# Altium PCB Control_Panel.PcbDoc
Units mm, origin at the board's own origin, x right, y up, seen from the top; angles counter-clockwise.
Board outline 130.03 x 155 mm, 2 copper layers (Top Layer, Bottom Layer); 144 components, 141 nets, 457 pads, 123 vias.
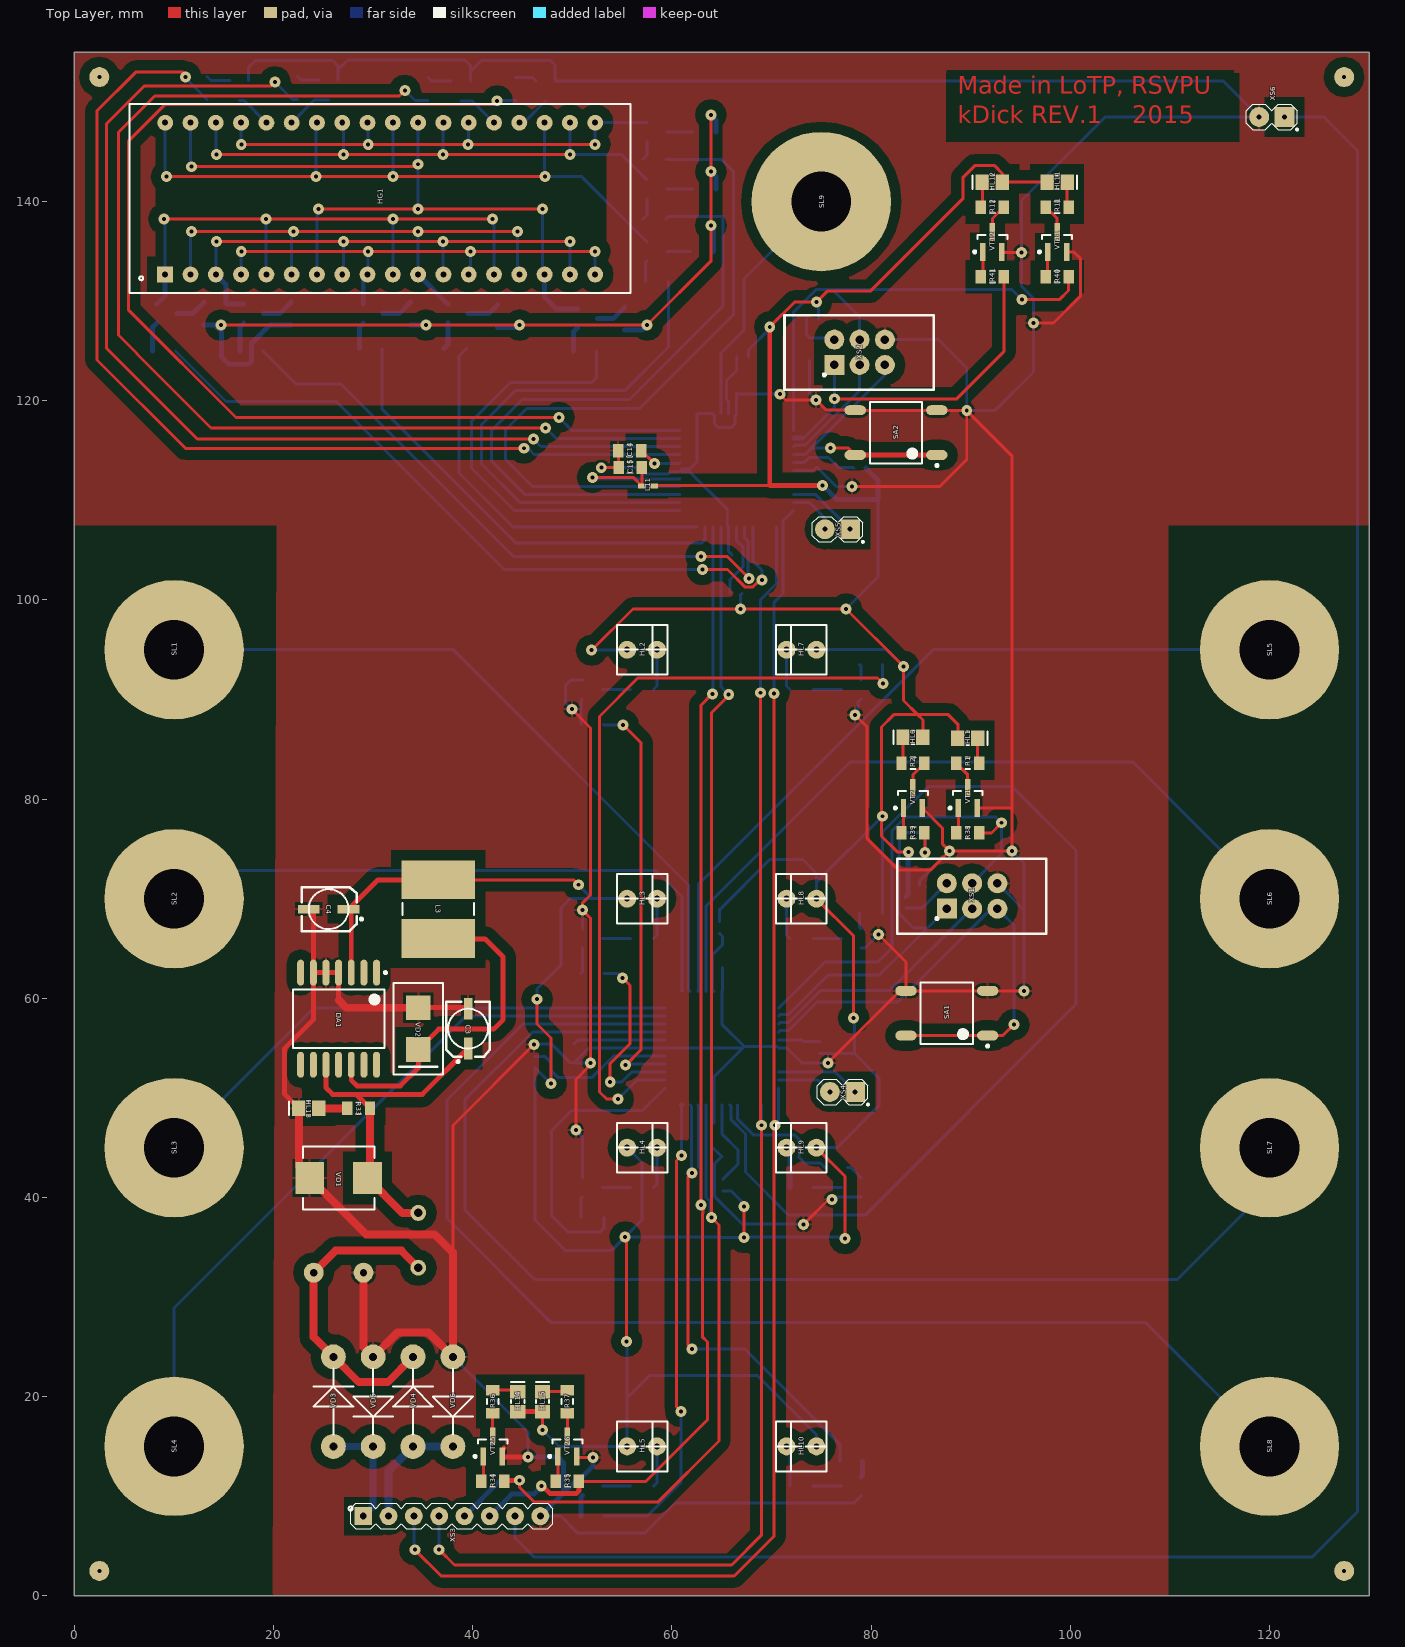
[diagram p0: Top Layer view]
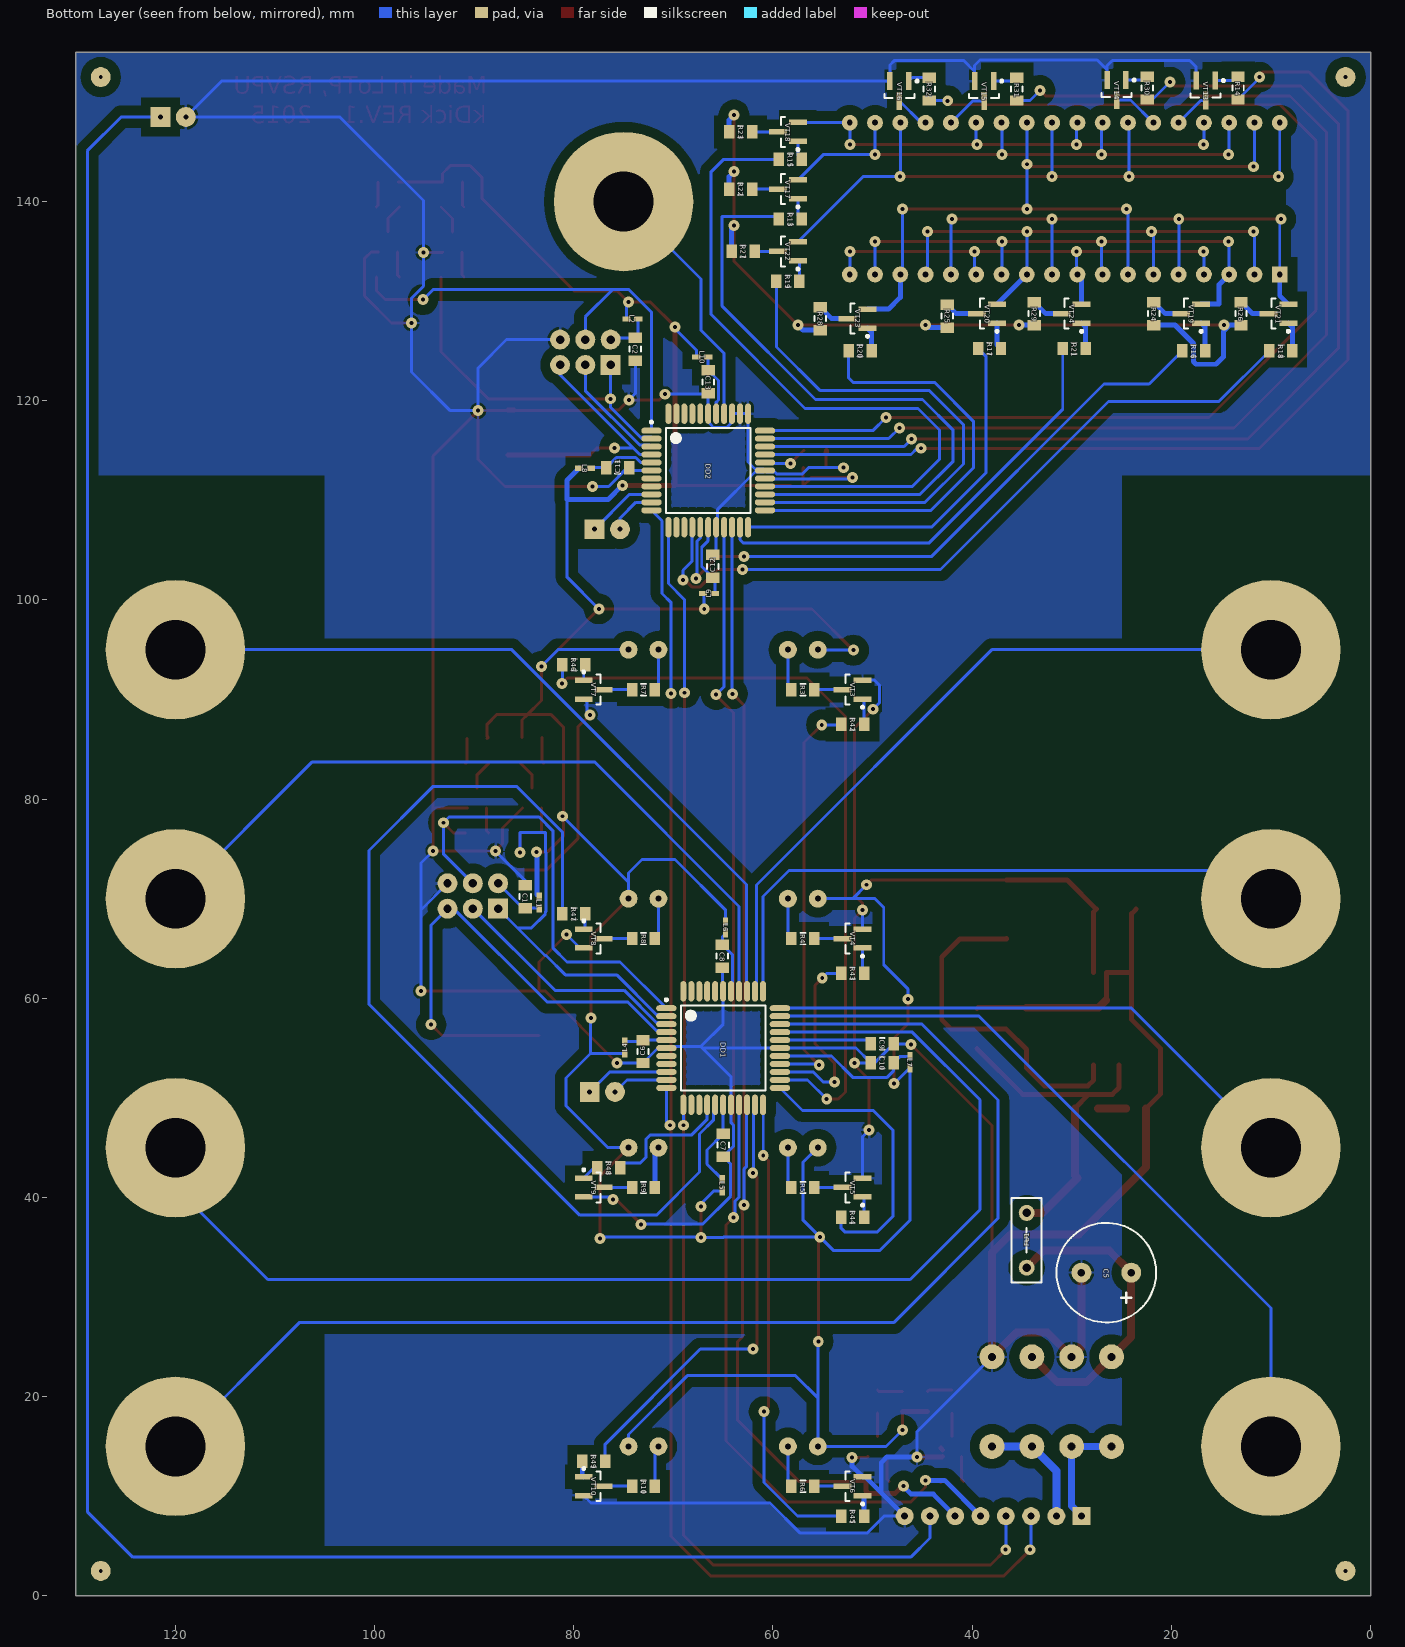
[diagram p1: Bottom Layer view, seen from below]

## Layer stack, top to bottom
Top Solder: solder mask 0.0102, Solder Resist, Dk 3.5
Top Layer: signal copper 0.0356
Dielectric 1: dielectric 0.32, FR-4, Dk 4.8
Bottom Layer: signal copper 0.0356
Bottom Solder: solder mask 0.0102, Solder Resist, Dk 3.5

## Board outline
-0.025,0 130,0 130,155 -0.025,155

## Design rules (kind name [scope] priority, off if disabled: settings)
Clearance Clearance_Poly [InPolygon] p1: gap=1
Clearance Clearance_AtmegaPad [(IsPad AND HasFootprint('44ML_M'))] p2: gap=0.2
Clearance Clearance_Poly_Sens [InPolygon vs InNet('SENS*') AND IsTrack] p3: gap=2.5
Clearance Clearance_SENS_2.5mm [(InPolygon) vs (InNet('SENS*')AND IsPad)] p4: gap=6.5
Clearance [All] p5: gap=0.2
ComponentClearance [Footprint = '305-021-12' vs Footprint = '305-021-12'] p1: gap=0 collisioncheckmode=3 verticalgap=0.254 showdistances=FALSE
PolygonConnect [All] p1: connectstyle=Relief reliefconductorwidth=0.254 reliefentries=4 polygonreliefangle="90 Angle" airgapwidth=0.254
RoutingVias [All] p1: holewidth=0.4 width=1.5 viastyle="Through Hole" minholewidth=0.4 minwidth=1.1 maxholewidth=0.4 maxwidth=1.5
SolderMaskExpansion [All] p1: expansion=0.102
Width [All] p1: maxlimit=0.8 minlimit=0.3 preferedwidth=0.5
28 further rules are at their usual default settings.

## Classes and differential pairs
net class LED_K[1..4]: LED_K1 LED_K2 LED_K3 LED_K4
net class SENS[1..8]: SENS1 SENS2 SENS3 SENS4 SENS5 SENS6 SENS7 SENS8
component class U_Control_Panel_Power: C3 C4 C5 C6 C7 C8 C9 C10 C11 C12 C13 C14 C15 DA1 FU1 HL13 L3 L4 L5 L6 L7 L8 L9 L10 L11 R33 VD1 VD2 VD3 VD4 VD5 VD6
component class U_Control_Panel: C1 DD1 HL1 HL2 HL3 HL4 HL5 HL6 HL7 HL8 HL9 HL10 L1 R1 R2 R3 R4 R5 R6 R7 R8 R9 R10 R38 R39 R42 R43 R44 R45 R46 R47 R48 R49 SA1 SL1 SL2 SL3 SL4 SL5 SL6 SL7 SL8 VT1 VT2 VT3 VT4 VT5 VT6 VT7 VT8 VT9 VT10 XS1
component class U_Control_Panel_Part2: C2 DD2 HG1 HL11 HL12 L2 R11 R12 R13 R14 R15 R16 R17 R18 R19 R20 R21 R22 R23 R24 R25 R26 R27 R28 R29 R30 R31 R32 R40 R41 SA2 SL9 VT11 VT12 VT13 VT14 VT15 VT16 XS2
net class LED[1..8]: LED1 LED2 LED3 LED4 LED5 LED6 LED7 LED8
component class TransistorArray: VT17 VT18 VT19 VT20 VT21 VT22 VT23 VT24
net class GATE[1..8]: GATE1 GATE2 GATE3 GATE4 GATE5 GATE6 GATE7 GATE8
component class TopShem: HL14 HL15 R34 R35 R36 R37 VT25 VT26 XS3 XS4 XS5 XS6
net class DRAIN[1..8]: DRAIN1 DRAIN2 DRAIN3 DRAIN4 DRAIN5 DRAIN6 DRAIN7 DRAIN8
net class SOURCE[1..8]: SOURCE1 SOURCE2 SOURCE3 SOURCE4 SOURCE5 SOURCE6 SOURCE7 SOURCE8

## Components (designator, comment, footprint, x,y, rotation, side; value= is the part's Value field where it differs from the comment)
C1 "100n" SMDRC0805 84.875,70.2 r90 bottom
C2 "100n" SMDRC0805 73.825,125.175 r270 bottom
C3 "CA050M2R20REB-0405" CAP_POLAR_ELLYTE_B 39.525,56.95 r90 top
C4 "CA016M0010REB-0405" CAP_POLAR_ELLYTE_B 25.525,68.95 r180 top
C5 "CA035M0220REG" CAP_POLAR_10mm 26.525,32.45 r180 bottom
C6 "100n" SMDRC0805 73.05,54.65 r270 bottom
C7 "100n" SMDRC0805 65,45.25 r270 bottom
C8 "100n" SMDRC0805 65.075,64.225 r270 bottom
C9 "100n" SMDRC0805 49.025,55.425 r180 bottom
C10 "100n" SMDRC0805 49.025,53.525 r180 bottom
C11 "100n" SMDRC0805 75.6,113.275 r180 bottom
C12 "100n" SMDRC0805 66.025,103.375 r90 bottom
C13 "100n" SMDRC0805 66.5,121.9 r270 bottom
C14 "100n" SMDRC0805 55.75,115 r180 top
C15 "100n" SMDRC0805 55.8,113.3 r0 top
DA1 "LM2574M-5.0" SOIC127P1030X264-14M 26.525,57.95 r270 top
DD1 "Atmega324P-20AU" 44ML_M 65,55 r180 bottom
DD2 "Atmega324P-20AU" 44ML_M 66.5,113 r180 bottom
FU1 "EFuse LP60-110F" "EFuse 1.1A" 34.525,32.95 r90 bottom
HG1 "CC56-11SRWA" CC56-11SRWA 30.7,140.3 r0 top
HL1 "Orange" DIOMELF2012M 89.7,86.1 r0 top
HL2 "" LED_diode 57,95 r0 top
HL3 "" LED_diode 57,70 r0 top
HL4 "" LED_diode 57,45 r0 top
HL5 "" LED_diode 57,15 r0 top
HL6 "Orange" DIOMELF2012M 84.2,86.2 r180 top
HL7 "" LED_diode 73,95 r180 top
HL8 "" LED_diode 73,70 r180 top
HL9 "" LED_diode 73,45 r180 top
HL10 "" LED_diode 73,15 r180 top
HL11 "Orange" DIOMELF2012M 98.675,141.95 r0 top
HL12 "Orange" DIOMELF2012M 92.175,141.95 r180 top
HL13 "Green" DIOMELF2012M 23.525,48.95 r180 top
HL14 "Orange" DIOMELF2012M 44.5,19.5 r90 top
HL15 "Orange" DIOMELF2012M 47,19.5 r90 top
L1 "MPZ1608S181A" INDC0603X03M 83.475,69.6 r270 bottom
L2 "MPZ1608S181A" INDC0603X03M 74.125,128.225 r180 bottom
L3 "SCD0705T-331K-N" INDP7972X50M 36.525,68.95 r270 top
L4 "MPZ1608S181A" INDC0603X03M 74.875,55.05 r90 bottom
L5 "MPZ1608S181A" INDC0603X03M 65.1,41.225 r90 bottom
L6 "MPZ1608S181A" INDC0603X03M 64.75,67.125 r270 bottom
L7 "MPZ1608S181A" INDC0603X03M 46.25,53.575 r90 bottom
L8 "MPZ1608S181A" INDC0603X03M 78.875,113.225 r180 bottom
L9 "MPZ1608S181A" INDC0603X03M 66.425,100.65 r180 bottom
L10 "MPZ1608S181A" INDC0603X03M 67.1,124.4 r180 bottom
L11 "MPZ1608S181A" INDC0603X03M 57.575,111.45 r180 top
R1 "220" SMDRC0805 89.7,83.6 r0 top
R2 "220" SMDRC0805 84.2,83.6 r180 top
R3 "220" SMDRC0805 57,91 r0 bottom
R4 "220" SMDRC0805 57,66 r0 bottom
R5 "220" SMDRC0805 57,41 r0 bottom
R6 "220" SMDRC0805 57,11 r0 bottom
R7 "220" SMDRC0805 73,91 r180 bottom
R8 "220" SMDRC0805 73,66 r180 bottom
R9 "220" SMDRC0805 73,41 r180 bottom
R10 "220" SMDRC0805 73,11 r180 bottom
R11 "220" SMDRC0805 98.675,139.45 r0 top
R12 "220" SMDRC0805 92.175,139.45 r180 top
R13 "220" SMDRC0805 58.25,138.25 r180 bottom
R14 "100" SMDRC0805 13.3,151.4 r90 bottom
R15 "220" SMDRC0805 58.25,144.25 r180 bottom
R16 "220" SMDRC0805 17.75,125 r180 bottom
R17 "220" SMDRC0805 38.25,125.25 r180 bottom
R18 "220" SMDRC0805 9,125 r180 bottom
R19 "220" SMDRC0805 58.5,132 r180 bottom
R20 "220" SMDRC0805 51.25,125 r180 bottom
R21 "220" SMDRC0805 29.75,125.25 r180 bottom
R22 "220" SMDRC0805 63.25,141.25 r0 bottom
R23 "220" SMDRC0805 63.25,147 r0 bottom
R24 "220" SMDRC0805 21.75,128.75 r270 bottom
R25 "220" SMDRC0805 42.5,128.5 r270 bottom
R26 "220" SMDRC0805 13,128.75 r270 bottom
R27 "220" SMDRC0805 63,135 r0 bottom
R28 "220" SMDRC0805 55.25,128.25 r270 bottom
R29 "220" SMDRC0805 33.75,128.75 r270 bottom
R30 "100" SMDRC0805 22.4,151.4 r90 bottom
R31 "100" SMDRC0805 35.5,151.3 r90 bottom
R32 "100" SMDRC0805 44.3,151.3 r90 bottom
R33 "750" SMDRC0805 28.525,48.95 r0 top
R34 "270" SMDRC0805 42,11.5 r0 top
R35 "270" SMDRC0805 49.5,11.5 r0 top
R36 "220" SMDRC0805 42,19.5 r90 top
R37 "220" SMDRC0805 49.5,19.5 r90 top
R38 "270" SMDRC0805 89.7,76.6 r180 top
R39 "270" SMDRC0805 84.2,76.6 r180 top
R40 "270" SMDRC0805 98.675,132.45 r180 top
R41 "270" SMDRC0805 92.175,132.45 r180 top
R42 "110" SMDRC0805 52,87.5 r180 bottom
R43 "110" SMDRC0805 52,62.5 r180 bottom
R44 "110" SMDRC0805 52,38 r180 bottom
R45 "110" SMDRC0805 52,8 r180 bottom
R46 "110" SMDRC0805 80,93.5 r180 bottom
R47 "110" SMDRC0805 80,68.5 r180 bottom
R48 "110" SMDRC0805 76.5,43 r0 bottom
R49 "110" SMDRC0805 78,13.5 r0 bottom
SA1 "DTSM20-4.3" DTSM20 87.6,58.5 r180 top
SA2 "DTSM20-4.3" DTSM20 82.5,116.8 r180 top
SL1 "Touch_sensor" "Bolt 6mm" 10,95 r0 top
SL2 "Touch_sensor" "Bolt 6mm" 10,70 r0 top
SL3 "Touch_sensor" "Bolt 6mm" 10,45 r0 top
SL4 "Touch_sensor" "Bolt 6mm" 10,15 r0 top
SL5 "Touch_sensor" "Bolt 6mm" 120,95 r0 top
SL6 "Touch_sensor" "Bolt 6mm" 120,70 r0 top
SL7 "Touch_sensor" "Bolt 6mm" 120,45 r0 top
SL8 "Touch_sensor" "Bolt 6mm" 120,15 r0 top
SL9 "Touch_sensor" "Bolt 6mm" 75,140 r0 top
VD1 "SM15T12CA" SUPRES3216X18N 26.525,41.95 r0 top
VD2 "10BQ060TRPBF" "SHOTKY 4.1x3.3" 34.525,56.95 r270 top
VD3 "1N4001" PinDiode 26,15 r90 top
VD4 "1N4001" PinDiode 34,15 r90 top
VD5 "1N4001" PinDiode 30,24 r270 top
VD6 "1N4001" PinDiode 38,24 r270 top
VT1 "2N7002" "SOT23 (TO-236AB)" 89.7,80.1 r90 top
VT2 "2N7002" "SOT23 (TO-236AB)" 84.2,80.1 r90 top
VT3 "2N7002" "SOT23 (TO-236AB)" 52,91 r0 bottom
VT4 "2N7002" "SOT23 (TO-236AB)" 52,66 r0 bottom
VT5 "2N7002" "SOT23 (TO-236AB)" 52,41 r0 bottom
VT6 "2N7002" "SOT23 (TO-236AB)" 52,11 r0 bottom
VT7 "2N7002" "SOT23 (TO-236AB)" 78,91 r180 bottom
VT8 "2N7002" "SOT23 (TO-236AB)" 78,66 r180 bottom
VT9 "2N7002" "SOT23 (TO-236AB)" 78,41 r180 bottom
VT10 "2N7002" "SOT23 (TO-236AB)" 78,11 r180 bottom
VT11 "2N7002" "SOT23 (TO-236AB)" 98.675,135.95 r90 top
VT12 "2N7002" "SOT23 (TO-236AB)" 92.175,135.95 r90 top
VT13 "2N7002" "SOT23 (TO-236AB)" 16.55,151.15 r270 bottom
VT14 "2N7002" "SOT23 (TO-236AB)" 25.5,151.2 r270 bottom
VT15 "2N7002" "SOT23 (TO-236AB)" 38.8,151.1 r270 bottom
VT16 "2N7002" "SOT23 (TO-236AB)" 47.3,151.1 r270 bottom
VT17 "2N7002" "SOT23 (TO-236AB)" 58.5,141.25 r0 bottom
VT18 "2N7002" "SOT23 (TO-236AB)" 58.5,147 r0 bottom
VT19 "2N7002" "SOT23 (TO-236AB)" 18,128.75 r0 bottom
VT20 "2N7002" "SOT23 (TO-236AB)" 38.5,128.75 r0 bottom
VT21 "2N7002" "SOT23 (TO-236AB)" 9.25,128.75 r0 bottom
VT22 "2N7002" "SOT23 (TO-236AB)" 58.5,135 r0 bottom
VT23 "2N7002" "SOT23 (TO-236AB)" 51.5,128.25 r0 bottom
VT24 "2N7002" "SOT23 (TO-236AB)" 30,128.75 r0 bottom
VT25 "2N7002" "SOT23 (TO-236AB)" 42,15 r90 top
VT26 "2N7002" "SOT23 (TO-236AB)" 49.5,15 r90 top
XS1 "IDC-06M" IDC-06M 87.6,69 r90 top
XS2 "IDC-06M" IDC-06M 76.3,123.6 r90 top
XS3 "PLS-08R" PLS-08R2 29,8 r0 top
XS4 "PLS-02" PLS-02 78.4,50.6 r180 top
XS5 "PLS-02" PLS-02 77.9,107.1 r180 top
XS6 "PLS-02R" PLS-02R1 121.5,148.5 r180 top

## Footprints (in the part's own frame and the unit in brackets; to place one, negate y for a bottom-side part, rotate by r counter-clockwise, add the part's x,y. Pads: shape width x height; smd on the part's side, far side on the other; paste and mask are expansions set on the pad)
44ML_M [mm] "Thin QFP, 44-Leads, Body 10x10mm, Pitch 0.8mm, IPC Low Density"
  oval 2.05x0.6 smd: 1(-5.7,4) 2(-5.7,3.2) 3(-5.7,2.4) 4(-5.7,1.6) 5(-5.7,0.8) 6(-5.7,0) 7(-5.7,-0.8) 8(-5.7,-1.6) 9(-5.7,-2.4) 10(-5.7,-3.2) 11(-5.7,-4) 23(5.7,-4) 24(5.7,-3.2) 25(5.7,-2.4) 26(5.7,-1.6) 27(5.7,-0.8) 28(5.7,0) 29(5.7,0.8) 30(5.7,1.6) 31(5.7,2.4) 32(5.7,3.2) 33(5.7,4)
  oval 0.6x2.05 smd: 12(-4,-5.7) 13(-3.2,-5.7) 14(-2.4,-5.7) 15(-1.6,-5.7) 16(-0.8,-5.7) 17(0,-5.7) 18(0.8,-5.7) 19(1.6,-5.7) 20(2.4,-5.7) 21(3.2,-5.7) 22(4,-5.7) 34(4,5.7) 35(3.2,5.7) 36(2.4,5.7) 37(1.6,5.7) 38(0.8,5.7) 39(0,5.7) 40(-0.8,5.7) 41(-1.6,5.7) 42(-2.4,5.7) 43(-3.2,5.7) 44(-4,5.7)
  silkscreen extent -5.82,-4.25 4.25,4.97, body extent -5,-5 5,5, height 1.2
"Bolt 6mm" [mm]
  round 14 hole 6: 1(0,0)
  body extent -7.94,-7.98 8,7.98, height 28
CAP_POLAR_10mm [mm] "Polar through-hole capactitor 10mm diamiter"
  round 2 hole 0.75: 1(-2.5,0) 2(2.5,0)
  silkscreen extent -5,-5 5,5, body extent -5.08,-5.08 5.08,5.08, height 10.16
CAP_POLAR_ELLYTE_B [mm] "Surface Mount Aluminum Electrolytic (size code B)"
  rect 2.2x0.85 smd: 1(2,0) 2(-2,0)
  silkscreen extent -3.42,-2.2 2.7,2.2, body extent -2.3,-2.15 2.3,2.15, height 5.41
CC56-11SRWA [mm]
  rect 1.6x1.6 hole 0.6: 1(-21.59,-7.62)
  round 1.6 hole 0.6: 2(-19.05,-7.62) 3(-16.51,-7.62) 4(-13.97,-7.62) 5(-11.43,-7.62) 6(-8.89,-7.62) 7(-6.35,-7.62) 8(-3.81,-7.62) 9(-1.27,-7.62) 10(1.27,-7.62) 11(3.81,-7.62) 12(6.35,-7.62) 13(8.89,-7.62) 14(11.43,-7.62) 15(13.97,-7.62) 16(16.51,-7.62) 17(19.05,-7.62) 18(21.59,-7.62) 19(21.59,7.62) 20(19.05,7.62) 21(16.51,7.62) 22(13.97,7.62) 23(11.43,7.62) 24(8.89,7.62) 25(6.35,7.62) 26(3.81,7.62) 27(1.27,7.62) 28(-1.27,7.62) 29(-3.81,7.62) 30(-6.35,7.62) 31(-8.89,7.62) 32(-11.43,7.62) 33(-13.97,7.62) 34(-16.51,7.62) 35(-19.05,7.62) 36(-21.59,7.62)
  silkscreen extent -25.15,-9.5 25.15,9.5, body extent -25.15,-9.5 25.15,9.5, height 8.2
DIOMELF2012M [mm] "MELF Diode, 2-Leads, Body 2,00x1,20mm, IPC Low Density"
  rect 1.35x1.55 smd: 1(-1,0) 2(1,0)
  silkscreen extent -0.15,-0.67 1.97,0.67, body extent -1,-0.6 1,0.6, height 1.2
DTSM20 [mm] "DTSM20 button footprint"
  oval 2.15x1 smd: 1(-4.1,2.25) 1(4.1,2.25) 2(-4.1,-2.25) 2(4.1,-2.25)
  silkscreen extent -4.23,-3.1 2.62,3.42, body extent -3.1,-3.1 3.1,3.1, height 5.5
"EFuse 1.1A" [mm]
  round 1.6 hole 0.85: 1(0,0) 2(5.5,0)
  silkscreen extent -1.5,-1.5 7,1.5, body extent -3.23,-0.5 8.73,0.5, height 12.99
IDC-06M [mm]
  rect 2x2 hole 0.85: 1(0,0)
  round 2 hole 0.85: 2(2.54,0) 3(0,-2.54) 4(2.54,-2.54) 5(0,-5.08) 6(2.54,-5.08)
  silkscreen extent -2.5,-10 5,5, body extent -2.5,-10 5,5, height 8.4
INDC0603X03M [mm] "Chip Inductor, 2-Leads, Body 0,60x0,30mm, IPC Low Density"
  rect 0.82x0.52 smd: 1(-0.595,0) 2(0.595,0)
  body extent -0.3,-0.15 0.3,0.15, height 0.3
INDP7972X50M [mm] "Precision Wire Wound Inductor, 2-Leads, Body 7,90x7,20mm, IPC Low Density"
  rect 3.9x7.4 smd: 1(-2.95,0) 2(2.95,0)
  silkscreen extent -0.6,-3.6 0.6,3.6, body extent -3.95,-3.6 3.95,3.6, height 5
LED_diode [mm]
  round 1.8 hole 0.6: A(-1.5,0) K(1.5,0)
  silkscreen extent -2.5,-2.5 2.57,2.5, body extent -2.98,-2.99 3,2.99, height 7.5
PinDiode [mm] "Simple pin diode with A and K designators"
  round 2.5 hole 0.8: A(0,0) K(9,0)
  silkscreen extent 1.2,-2 7.8,2, body extent -0.4,-1.4 9.4,1.4, height 2.79
PLS-02 [mm] "вилка на плату"
  rect 2x2 hole 0.5: 1(0,0)
  round 2 hole 0.5: 2(2.54,0)
  silkscreen extent -1.37,-1.27 3.81,1.37, body extent -1.27,-1.25 3.81,1.25, height 8.6
PLS-02R1 [mm] "вилка на плату"
  rect 2x2 hole 0.5: 1(0,0)
  round 2 hole 0.5: 2(2.54,0)
  silkscreen extent -1.37,-1.27 3.81,1.37, body extent -1.27,-6 3.81,1.25, height 6.1
PLS-08R2 [mm] "угловая вилка на плату"
  rect 1.8x1.8 hole 0.7: 1(0,0)
  round 1.8 hole 0.7: 2(2.54,0) 3(5.08,0) 4(7.62,0) 5(10.16,0) 6(12.7,0) 7(15.24,0) 8(17.78,0)
  silkscreen extent -1.47,-1.27 19.05,1.27, body extent -1.27,-6 19.06,1.25, height 6.1
"SHOTKY 4.1x3.3" [mm]
  rect 2.5x2.5 smd: A(-2.1,0) K(2.1,0)
  silkscreen extent -4.6,-2.5 4.6,2.5
SMDRC0805 [mm] "Chip Resistor, 2-Leads, Body 2,00x1,20mm, IPC Low Density"
  rect 1.05x1.35 smd: 1(-1.15,0) 2(1.15,0)
  silkscreen extent -0.25,-0.57 0.25,0.58, body extent -1,-0.6 1,0.6, height 0.4
SOIC127P1030X264-14M [mm] "SOIC, 14-Leads, Body 8,99x7,49mm, Pitch 1,27mm, IPC Low Density"
  oval 2.6x0.7 smd: 1(-4.625,3.81) 2(-4.625,2.54) 3(-4.625,1.27) 4(-4.625,0) 5(-4.625,-1.27) 6(-4.625,-2.54) 7(-4.625,-3.81) 8(4.625,-3.81) 9(4.625,-2.54) 10(4.625,-1.27) 11(4.625,0) 12(4.625,1.27) 13(4.625,2.54) 14(4.625,3.81)
  silkscreen extent -4.75,-4.6 2.92,4.84, body extent -3.8,-4.6 3.8,4.6, height 2.65
"SOT23 (TO-236AB)" [mm] "SOT23, 3-Leads, Body 2,90x2,45mm, Pitch 0,95mm, IPC Low Density"
  rect 1.8x0.55 smd: 1(-1,0.95) 2(-1,-0.95) 3(1,0)
  silkscreen extent -1.12,-1.5 0.7,1.9, body extent -0.7,-1.5 0.7,1.5, height 1.1
SUPRES3216X18N [mm]
  rect 2.9x3.25 smd: 1(-2.9,0) 2(2.9,0)
  silkscreen extent -3.6,-3.15 3.6,3.15, body extent -3.57,-3.13 3.57,3.13, height 2.65

## Part data
C1 C2 C6 C7 C8 C9 C10 C11 C12 C13 C14 C15: library part "Capacitor 0805 100n", "Generic capasitor non-polar"
C3: library part 02200_050, "2,2uF 50V Polar capacitor"
C4: library part 10000_016, "10uF 16V Polar SMD cap"
C5: library part 470000_050, "470uF 50V Polar capacitor"
DD1 DD2: "Microcontroller 8-bit"
FU1: "Fuse"
HG1: "The Super Bright Red source color devices are made with  Gallium Aluminum Arsenide Red Light Emitting Diode."
HL1 HL6 HL11 HL12 HL14 HL15: library part LED1_O, "Diod LED SMD Orange"
HL2 HL3 HL4 HL5 HL7 HL8 HL9 HL10: library part _LED1_АЛ102, "Diod LED"
HL13: library part LED1_G, "Diod LED SMD Green"
L1 L2 L4 L5 L6 L7 L8 L9 L10 L11: library part "Ferrite Bead", "Ferrite Bead"
L3: "Inductor"
R1 R2 R3 R4 R5 R6 R7 R8 R9 R10 R11 R12 R13 R15 R16 R17 R18 R19 R20 R21 R22 R23 R24 R25 R26 R27 R28 R29 R36 R37: library part "Resistor 0805 220", "Generic resistor"
R14 R30 R31 R32: library part "Resistor 0805 100", "Generic resistor"
R33: library part "Resistor 0805 750", "Generic resistor"
R34 R35 R38 R39 R40 R41: library part "Resistor 0805 270", "Generic resistor"
R42 R43 R44 R45 R46 R47 R48 R49: library part "Resistor 0805 110", "Generic resistor"
SA1 SA2: library part Switch1_DTSM20-4.3, "Switch open"
SL1 SL2 SL3 SL4 SL5 SL6 SL7 SL8 SL9: "Bolt touch sensor"
VD1: "Diod suppressor"
VD2: "DIODE SCHOTTKY 60V 1A DO214AA"
VD3 VD4 VD5 VD6: "Rectifying diode"
VT1 VT2 VT3 VT4 VT5 VT6 VT7 VT8 VT9 VT10 VT11 VT12 VT13 VT14 VT15 VT16 VT17 VT18 VT19 VT20 VT21 VT22 VT23 VT24 VT25 VT26: library part "2N7002 n-MOSFET", "60V, 300mA N-channel Trench MOSFET"
XS1 XS2: library part "Con6_M IDC-06M_SPI", "SPI connector"
XS3: library part "Con8_M PLS-08MR", "Male 8-pin connection"
XS4 XS5: library part Con2_M_PLS-02, "Male 2-pin connection"
XS6: library part Con2_M_PLS-02R, "Male 2-pin connection"

## Free pads (board coordinates)
  round 2 hole 0.4: 0(127.5,152.5) 1(2.5,152.5) 2(2.5,2.5) 3(127.5,2.5)

## Via types
v1: diameter 1.1, hole 0.4, Top Layer to Bottom Layer, 123 vias

## Nets (pads, with @x,y where several pads share a name; then routed paths per layer and width w, separated by ;. In a path a pad name is that pad's centre, name@x,y a point inside that pad or via, vN(x,y) a via of type N, cw(c..) or ccw(c..) an arc to the next point about the centre after c; other vN are vias at no path point)
+5V: C4.2 DA1.3 HL1.1 HL2.A HL3.A HL4.A HL5.A HL6.1 HL7.A HL8.A HL9.A HL10.A HL11.1 HL12.1 HL14.1 HL15.1 L1.1 L2.1 L3.1 L4.1 L5.1 L6.1 L7.1 L8.1 L9.1 L10.1 L11.1 | length 444
  Top Layer w0.3: L3.1 50.1,71.9 v1(50.6,71.4) ; v1(46.452,59.903) 46.452,57.423 47.852,56.023 v1(47.852,51.428) ; v1(47,16.65) HL15.1 ; v1(51.925,94.95) 56.075,99.1 v1(66.9,99.1) v1(77.484,99.1) v1(83.254,93.33) 83.254,89.896 84.675,88.475 ; v1(55.3,36.05) 55.45,35.9 v1(55.45,25.55) ; L11.1 58.22,111.5 69.818,111.5 ; v1(67.225,35.975) v1(67.225,39.1) ; v1(69.818,127.425) 72.293,129.9 v1(74.5,129.9) 75.6,131 79.92,131 89.2,140.28 89.2,142.4 90.4,143.6 92.4,143.6 93.175,142.825 HL12.1 HL11.1 ; HL9.A 77.375,42.125 v1(77.375,35.875) ; HL8.A 78.254,66.246 78.25,66.242 v1(78.25,58) ; v1(83.729,74.704) 82.621,74.704 81.05,76.275 81.05,87.25 82.275,88.475 84.675,88.475 ; HL6.1 85.2,87.95 84.675,88.475 ; HL1.1 88.6,86.2 88.7,86.3 88.7,87.525 87.75,88.475 84.675,88.475
  Top Layer w0.5: DA1.3 27.795,68.68 C4.2 30.475,71.9 L3.1 ; HL14.1 HL15.1 ; v1(69.818,127.425) 69.818,111.5 v1(75.127,111.5) ; HL9.A HL9.A@74.822,45.322
  Bottom Layer w0.3: v1(46.452,59.903) 46.452,60.952 48.875,63.375 48.875,69.125 49.75,70 HL3.A 52,70 v1(50.6,71.4) ; v1(47,16.65) 48.65,15 HL5.A 55.5,19.875 ; v1(47.852,51.428) 46.3,52.98 L7.1 46.25,37.7 49.3,34.65 53.9,34.65 v1(55.3,36.05) ; v1(51.925,94.95) 55.45,94.95 HL2.A ; v1(55.45,25.55) 55.5,25.5 55.5,19.875 ; HL4.A 57,43.5 57,37.75 v1(55.3,36.05) ; L6.1 64.75,68.85 69.825,73.925 73.15,73.925 74.5,72.575 74.5,71.65 ; L5.1 65.97,40.63 67.225,39.375 v1(67.225,39.1) ; v1(66.9,99.1) 66.9,100.53 L9.1 ; v1(67.225,35.975) 64.975,35.975 64.9,36.05 v1(55.3,36.05) ; v1@67.225,36.05 77.2,36.05 v1(77.375,35.875) ; L10.1 67.695,125.095 69.825,127.225 v1@69.825,127.65 ; HL10.A 74.5,16.2 68.6,22.1 57.725,22.1 55.5,19.875 ; HL9.A 76.575,45 80.775,49.2 80.775,52 78.32,54.455 ; HL8.A 74.5,71.65 ; HL7.A 81.575,95 83.245,93.33 v1(83.254,93.33) ; v1(74.5,129.9) 74.72,129.68 L2.1 ; L4.1@74.875,54.48 L4.1 78.32,54.455 ; v1(77.484,99.1) 80.7,102.316 80.7,110.077 ; v1(78.25,58) 78.32,57.93 78.32,54.455 ; v1(81.129,78.279) 74.5,71.65
  Bottom Layer w0.5: v1(75.127,111.5) 75.124,111.5 76.546,110.077 80.7,110.077 80.7,111.995 L8.1 ; L1.1 83.7,70.42 83.7,74.675 v1(83.729,74.704)
DRAIN1: R22.1 VT17.3 | length 2.6
  Bottom Layer w0.3: VT17.3 R22.1
DRAIN2: R23.1 VT18.3 | length 2.6
  Bottom Layer w0.3: VT18.3 R23.1
DRAIN3: R24.1 VT19.3 | length 3.2
  Bottom Layer w0.5: VT19.3 20.6,128.75 R24.1
DRAIN4: R25.1 VT20.3 | length 3.4
  Bottom Layer w0.5: VT20.3 41.6,128.75 R25.1
DRAIN5: R26.1 VT21.3 | length 3.2
  Bottom Layer w0.5: VT21.3 11.85,128.75 R26.1
DRAIN6: R27.1 VT22.3 | length 2.4
  Bottom Layer w0.3: VT22.3 R27.1
DRAIN7: R28.1 VT23.3 | length 3.2
  Bottom Layer w0.5: VT23.3 54.1,128.25 R28.1
DRAIN8: R29.1 VT24.3 | length 3.2
  Bottom Layer w0.5: VT24.3 32.6,128.75 R29.1
GATE1: R13.2 VT17.1 | length 2.2
  Bottom Layer w0.3: R13.2 57.5,138.65 VT17.1
GATE2: R15.2 VT18.1 | length 2
  Bottom Layer w0.3: R15.2 57.5,144.65 VT18.1
GATE3: R16.2 VT19.1 | length 3
  Bottom Layer w0.5: R16.2 16.6,127.4 VT19.1
GATE4: R17.2 VT20.1 | length 2.7
  Bottom Layer w0.5: R17.2 37.5,125.65 VT20.1
GATE5: R18.2 VT21.1 | length 3
  Bottom Layer w0.5: R18.2 7.85,127.4 VT21.1
GATE6: R19.2 VT22.1 | length 2.1
  Bottom Layer w0.3: R19.2 57.35,133.9 VT22.1
GATE7: R20.2 VT23.1 | length 2.5
  Bottom Layer w0.5: R20.2 50.1,126.9 VT23.1
GATE8: R21.2 VT24.1 | length 2.7
  Bottom Layer w0.5: R21.2 28.6,127.4 VT24.1
GND: C1.2 C2.2 C3.1 C4.1 C5.1 C6.2 C7.2 C8.2 C9.2 C10.1 C11.2 C12.2 C13.2 C14.2 C15.1 DA1.4 DA1.5 DA1.6 DD1.6 DD1.18 DD1.28 DD1.39 DD2.6 DD2.18 DD2.28 DD2.34 DD2.35 DD2.36 DD2.39 HL13.2 SA1.2 SA2.2 VD1.1 VD2.A VD5.A VD6.A VT1.2 VT2.2 VT3.2 VT4.2 VT5.2 VT6.2 VT7.2 VT8.2 VT9.2 VT10.2 VT11.2 VT12.2 VT13.2 VT14.2 VT15.2 VT16.2 VT25.2 VT26.2 XS1.6 XS2.6 XS3.8 XS6.2 | length 744.1
  Top Layer w0.3: 38,34.45 38,47.225 v1(46.127,55.353) ; v1(49.95,89.025) 51.825,87.15 51.825,70.375 51,69.55 v1(51,68.875) 51.803,68.072 v1(51.803,53.503) 51.803,53.303 50.352,51.852 v1(50.352,46.752) ; VT26.2 50.575,13.875 v1(52.05,13.875) ; v1(52.9,113.275) 52.925,113.3 C15.1 C14.2@54.65,114.8 ; v1(70.828,120.656) 71.409,120.075 v1(74.475,120.075) 75.5,119.05 78.4,119.05 78.45,119 v1(89.6,119) ; v1(73.229,37.302) 75.727,39.8 v1(76.05,39.8) ; v1(75.651,53.5) 82.901,60.75 SA1.2@83.5,60.75 ; v1(78.1,111.4) 86.9,111.4 89.6,114.1 v1(89.6,119) ; v1(78.379,88.454) 79.6,87.233 79.6,76.025 82.725,72.9 85.975,72.9 v1(87.875,74.8) ; v1(80.729,66.403) 83.5,63.632 SA1.2@83.5,60.75 ; VT2.2 87.15,77.1 87.15,75.525 v1(87.875,74.8) ; VT1.2 93.975,79.1 94.125,78.95 ; VT12.2 93.175,134.9 v1(95.1,134.9) ; v1(95.35,60.725) 95.325,60.75 91.7,60.75 SA1.2@83.5,60.75 ; v1(96.3,127.8) 98.3,127.8 101,130.5 101,134.3 100.35,134.95 VT11.2 ; v1(87.875,74.8) 93.875,74.8 93.925,74.75 93.975,74.8 v1(94.125,74.8) 94.125,78.95 ; v1(89.6,119) 94.125,114.475 94.125,78.95
  Top Layer w0.5: HL13.2 21.1,50.375 21.1,54.975 23.985,57.86 DA1.6 ; C4.1 23.985,68.49 DA1.6 ; 26.55,59.8 26.525,59.825 DA1.4 DA1.5 DA1.6 ; VD2.A 39.425,59.05 C3.1 ; VT25.2 43,13.95 v1(45.55,13.95) ; VT25.2@42.95,14.624 VT25.2@43.148,14.822 ; C14.2 54.6,114.8 C14.2@54.65,114.8 ; SA2.2@86.023,119.05 SA2.2@86.6,119.05
  Top Layer w0.8: HL13.2 22.525,43.05 VD1.1 29.275,36.3 36.15,36.3 38,34.45 VD6.A 35.55,26.45 32.45,26.45 VD5.A 29.025,24.975 C5.1 ; 26.55,59.8 27.3,59.05 VD2.A
  Bottom Layer w0.3: VT13.2 17.5,153.525 18.15,154.175 25.925,154.175 26.45,153.65 VT14.2 26.45,153.227 27.448,154.225 39.2,154.225 39.75,153.675 VT15.2 39.75,153.075 40.825,154.15 47.825,154.15 48.25,153.725 VT16.2 115.36,152.1 XS6.2 103.5,148.5 95.1,140.1 v1(95.1,134.9) 95.1,131.5 96.3,130.3 v1(96.3,127.8) 96.3,122.9 92.4,119 v1(89.6,119) 89.6,123.3 86.76,126.14 XS2.6 ; VD6.A 45.55,16.45 v1(45.55,13.95) ; v1(46.127,55.353) 46.2,55.425 C9.2 49.775,53.525 C10.1 ; XS3.8 48.825,8 50.5,6.325 57.3,6.325 60.3,9.325 78.275,9.325 VT10.2 ; v1(49.95,89.025) 49.325,89.65 49.325,91.45 49.825,91.95 VT3.2 ; v1(50.352,46.752) 51,46.105 VT5.2 ; VT4.2 v1(51,68.875) ; v1(51.803,53.503) 50.197,53.503 C10.1 ; v1(52.9,113.275) 56.425,113.275 57.075,112.625 59.581,112.625 59.806,112.85 60.65,112.85 DD2.28 ; C8.2 65.075,60.775 DD1.39 65,57.4 67.25,55.15 ; C12.2 65.7,104.85 DD2.18 65.55,107.45 65.55,109.094 61.794,112.85 60.95,112.85 DD2.28 ; v1(70.828,120.656) 66.594,120.656 C13.2 DD2.39 66.35,118.55 66.35,117.706 65.969,117.325 64.631,117.325 64.25,117.706 64.25,118.55 DD2.36 DD2.35 DD2.34 62.5,113.856 61.794,113.15 60.95,113.15 DD2.28 ; DD2.6 74.175,113 C11.2 74.624,113.275 76.499,111.4 v1(78.1,111.4) v1@78.1,111.55 ; v1(73.229,37.302) 73.277,37.35 67.025,37.35 64.25,40.125 64.25,43.35 C7.2 63.975,45.125 63.975,47.275 64.2,47.5 DD1.18 64.2,52.1 67.1,55 ; C2.2 73.825,120.725 v1(74.475,120.075) ; v1(75.651,53.5) C6.2 71.55,55 DD1.6 70.55,55.15 67.25,55.15 ; v1(76.05,39.8) 76.3,40.05 VT9.2 ; v1(78.379,88.454) 78.684,88.759 78.684,89.734 VT7.2 ; VT8.2 79.376,65.05 v1(80.729,66.403) ; C1.2 84.875,71.8 v1(87.875,74.8) ; XS1.6 95.35,68.87 ; v1(94.125,74.8) 95.35,73.575 95.35,68.87 ; v1(95.35,60.725) 95.35,68.87 ; C10.1 51.65,55 DD1.28 67.1,55 ; 67.1,55 67.25,55.15
  Bottom Layer w0.5: v1(45.55,13.95) 48.55,13.95 49.125,13.375 49.125,10.345 ; XS3.8 49.125,10.345 ; v1(52.05,13.875) 52.05,13 VT6.2 50.73,11.95 49.125,10.345
INT0: DD1.11 DD2.11 XS3.3 | length 150.1
  Top Layer w0.3: v1(34.175,4.625) 36.825,1.975 66.25,1.975 70.25,5.975 70.25,47.175 v1(70.325,47.25) 70.25,47.325 70.25,90.6 v1(70.225,90.625)
  Bottom Layer w0.3: XS3.3 34.08,4.72 v1(34.175,4.625) ; v1(70.225,90.625) 70.225,99.725 71.15,100.65 71.15,107.95 DD2.11 ; v1(70.325,47.25) 70.7,47.625 DD1.11
INT1: DD1.12 DD2.12 XS3.4 | length 141.6
  Top Layer w0.3: v1(36.625,4.625) 38.15,3.1 66,3.1 68.975,6.075 v1(68.975,47.25) 68.878,47.347 v1(68.878,90.679)
  Bottom Layer w0.3: v1@36.62,4.625 XS3.4 ; v1(68.878,90.679) 68.878,100.028 70.5,101.65 DD2.12 ; v1(68.975,47.25) 69,47.275 DD1.12
LED1: DD1.22 R45.1 | length 47.5
  Top Layer w0.3: v1(60.9,18.5) 60.45,18.95 60.45,43.7 v1(60.975,44.225)
  Bottom Layer w0.3: R45.1 57.525,8 60.9,11.375 v1(60.9,18.5) ; v1(60.975,44.225) DD1.22@60.975,49.275
  Bottom Layer w0.5: DD1.22@60.975,49.275 DD1.22
LED2: DD1.23 R44.1 | length 28.9
  Bottom Layer w0.3: R44.1 53.15,36.9 52.8,36.55 49.5,36.55 47.925,38.125 47.925,46.725 49.925,48.725 57.025,48.725 DD1.23
LED3: DD1.25 R43.1 | length 19.6
  Top Layer w0.3: v1(53.8,51.6) 53.8,53.45 55.775,55.425 55.775,61.3 v1(55.05,62.025)
  Bottom Layer w0.3: R43.1 54.575,62.5 v1(55.05,62.025) ; v1(53.8,51.6) 53.825,51.575 54.925,51.575 55.95,52.6 DD1.25
LED4: DD1.26 R42.1 | length 41.5
  Top Layer w0.3: v1(55.1,87.45) 56.875,85.675 56.875,54.8 v1(55.353,53.278)
  Bottom Layer w0.3: R42.1@53.125,87.475 53.15,87.45 v1(55.1,87.45) ; v1(55.353,53.278) 55.475,53.4 DD1.26
LED5: DD1.21 R49.1 | length 45.4
  Top Layer w0.3: v1(62.025,24.8) 61.625,25.2 61.625,42.049 v1(62.028,42.452)
  Bottom Layer w0.3: DD1.21 61.95,49.15 61.95,42.53 v1(62.028,42.452) ; v1(62.025,24.8) 62.05,24.775 67.3,24.775 76.85,15.225 R49.1
LED6: DD1.15 R48.1 | length 13.3
  Bottom Layer w0.3: DD1.15 66.6,47.85 68.2,46.25 72.35,46.25 72.75,45.85 72.75,44.025 73.3,43.475 74.875,43.475 R48.1
LED7: DD1.16 R47.1 | length 98.8
  Bottom Layer w0.3: DD1.16 65.95,49.15 65.95,47.793 67.375,46.368 67.375,42.55 71.7,38.225 79.4,38.225 100.575,59.4 100.575,74.85 94.175,81.25 85.7,81.25 81.15,76.7 R47.1
LED8: DD1.24 R46.1 | length 77.6
  Top Layer w0.3: v1(54.6,49.875) 53.45,49.875 52.725,50.6 52.725,88.3 56.575,92.15 80.65,92.15 v1(81.2,91.6)
  Bottom Layer w0.3: v1(54.6,49.875) 56.525,51.8 DD1.24 ; R46.1 81.15,91.65 v1(81.2,91.6)
LED_AN1: DD2.25 R13.1 | length 66.6
  Bottom Layer w0.3: R13.1 59.65,138.5 65.1,138.5 65.1,129.5 55.725,120.125 44.975,120.125 41.9,117.05 41.9,113.925 45.225,110.6 DD2.25
LED_AN2: DD2.26 R15.1 | length 71
  Bottom Layer w0.3: R15.1 64.95,144.25 66.2,143 66.2,128.65 56.775,119.225 45.425,119.225 43.275,117.075 43.275,114.125 46,111.4 DD2.26
LED_AN3: DD2.16 R16.1 | length 63.6
  Top Layer w0.3: v1(62.925,104.375) 65.525,104.375 v1(67.725,102.175)
  Bottom Layer w0.3: R16.1 22.225,121.675 26.75,121.675 44.05,104.375 v1(62.925,104.375) ; DD2.16 67.3,106.207 67.65,105.857 67.65,102.25 v1(67.725,102.175)
LED_AN4: DD2.22 R17.1 | length 39
  Bottom Layer w0.3: R17.1 38.625,124.475 38.625,112.75 44.075,107.3 DD2.22
LED_AN5: DD2.15 R18.1 | length 74.7
  Top Layer w0.3: v1(63.053,103.055) 65.572,103.055 67.352,101.275 68.098,101.275 68.803,101.98 v1(69.028,101.98)
  Bottom Layer w0.3: R18.1 15.225,119.925 26.3,119.925 43.17,103.055 v1(63.053,103.055) ; DD2.15 68.15,107.25 68.15,103.85 69.028,102.972 v1(69.028,101.98)
LED_AN6: DD2.24 R19.1 | length 54.1
  Bottom Layer w0.3: R19.1 59.65,125.4 55.3,121.05 44.325,121.05 40.875,117.6 40.875,113.65 44.725,109.8 DD2.24
LED_AN7: DD2.23 R20.1 | length 44.4
  Bottom Layer w0.3: R20.1 52.4,122.275 51.95,121.825 43.75,121.825 39.875,117.95 39.875,113.25 44.125,109 DD2.23
LED_AN8: DD2.21 R21.1 | length 45.5
  Bottom Layer w0.3: R21.1 30.9,119.15 44.35,105.7 62.95,105.7 63.3,106.05 DD2.21
LED_K1: DD2.30 R14.1 | length 101.5
  Top Layer w0.3: v1(11.151,152.507) 11.151,152.749 10.9,153 6.15,153 2.275,149.125 2.275,124.1 11.144,115.231 v1(45.127,115.231)
  Bottom Layer w0.3: v1(11.151,152.507) 11.151,152.399 R14.1 ; v1(45.127,115.231) 45.519,115.231 46.15,114.6 DD2.30
LED_K2: DD2.31 R30.1 | length 105.9
  Top Layer w0.3: v1(20.126,152.007) 19.719,151.6 7,151.6 3.225,147.825 3.225,125.261 12.336,116.15 v1(46.075,116.15)
  Bottom Layer w0.3: v1(20.126,152.007) 21.883,150.25 R30.1 ; v1(46.075,116.15) 46.825,115.4 DD2.31
LED_K3: DD2.32 R31.1 | length 114.3
  Top Layer w0.3: v1(33.177,151.157) 32.619,150.6 8.075,150.6 4.425,146.95 4.425,126.6 6.275,124.75 6.275,124.7 13.7,117.275 v1(47.3,117.275)
  Bottom Layer w0.3: v1(33.177,151.157) 34.184,150.15 R31.1 ; v1(47.3,117.275) 48.375,116.2 DD2.32
LED_K4: DD2.33 R32.1 | length 117.9
  Top Layer w0.3: v1(42.45,150.125) 42.05,149.725 9.075,149.725 5.45,146.1 5.45,129.1 16.225,118.325 v1(48.65,118.325)
  Bottom Layer w0.3: v1(42.45,150.125) 42.475,150.15 R32.1 ; v1(48.65,118.325) 49.975,117 DD2.33
NetC1_1: C1.1 L1.2 XS1.2 | length 5.2
  Bottom Layer w0.3: L1.2 83.52,69.05 C1.1 85.11,69.05 XS1.2
NetC2_1: C2.1 L2.2 XS2.2 | length 4.6
  Bottom Layer w0.3: L2.2 73.53,126.62 C2.1 76.115,126.325 XS2.2
NetC3_2: C3.2 DA1.10 FU1.2 R33.2 VD1.2 | length 34.4
  Top Layer w0.5: DA1.10 25.255,51.02 25.925,50.35 28.275,50.35 ; R33.2 28.275,50.35 ; C3.2 34.925,50.35 28.275,50.35
  Top Layer w0.8: R33.2 29.675,42.2 VD1.2 32.925,38.45 FU1.2
NetC5_2: C5.2 FU1.1 VD3.K VD4.K | length 31.5
  Top Layer w0.8: VD4.K 31.45,21.45 28.55,21.45 VD3.K 24.025,25.975 C5.2 26.225,34.65 32.825,34.65 FU1.1
NetC6_1: C6.1 DD1.5 L4.2 | length 4.2
  Bottom Layer w0.3: DD1.5 C6.1 73.205,55.645 L4.2
NetC7_1: C7.1 DD1.17 L5.2 | length 8.8
  Bottom Layer w0.3: DD1.17 C7.1 66.625,44.775 66.625,43.345 L5.2
NetC8_1: C8.1 DD1.38 L6.2 | length 6.5
  Bottom Layer w0.3: DD1.38 64.05,60.85 64.05,64.35 C8.1 65.075,66.205 L6.2
NetC9_1: C9.1 DD1.29 | length 9.3
  Bottom Layer w0.3: C9.1 50.55,55.8 DD1.29
NetC10_2: C10.2 DD1.27 L7.2 | length 15.3
  Bottom Layer w0.3: L7.2 47.23,54.17 C10.2 47.875,52.725 48.575,52.025 51.95,52.025 54.125,54.2 DD1.27
NetC11_1: C11.1 DD2.5 L8.2 | length 6.7
  Bottom Layer w0.3: DD2.5 73.28,113.8 73.78,114.3 75.725,114.3 C11.1 78.23,113.275 L8.2
NetC12_1: C12.1 DD2.17 L9.2 | length 7.5
  Bottom Layer w0.3: L9.2 65.83,102.03 C12.1 67.15,103.35 67.15,105.3 66.5,105.95 DD2.17
NetC13_1: C13.1 DD2.38 L10.2 | length 6.2
  Bottom Layer w0.3: DD2.38 65.7,119.855 65.475,120.08 65.475,122.025 C13.1 66.505,123.055 L10.2
NetC14_1: C14.1 DD2.29 | length 4.5
  Top Layer w0.3: C14.1 56.945,115 58.228,113.717 v1(58.228,113.681)
  Bottom Layer w0.3: v1(58.228,113.681) 60.681,113.681 DD2.29
NetC15_2: C15.2 DD2.27 L11.2 | length 16.1
  Top Layer w0.3: v1(52.028,112.305) 52.058,112.275 56.155,112.275 L11.2 56.98,113.27 C15.2 C15.2@56.905,113.255
  Bottom Layer w0.3: v1(52.028,112.305) 52.208,112.125 60.725,112.125 DD2.27
NetDA1_12: DA1.12 L3.2 VD2.K | length 34.5
  Top Layer w0.5: DA1.12 27.795,51.78 28.375,51.2 32.725,51.2 34.525,53 VD2.K 36.575,56.9 42.1,56.9 43.05,57.85 43.05,64.15 41.225,65.975 36.55,65.975 L3.2
NetDD1_1: DD1.1 R38.1 XS1.4 | length 47.5
  Top Layer w0.3: R38.1 92.075,76.6 v1(93.1,77.625)
  Bottom Layer w0.3: DD1.1 75.35,63.65 80.675,63.65 82.1,65.075 82.1,76.825 83.475,78.2 92.525,78.2 v1(93.1,77.625) 93.1,74.5 XS1.4
NetDD1_2: DD1.2 R39.1 XS1.1 | length 39.6
  Top Layer w0.3: R39.1 85.4,76.55 v1(85.4,74.625)
  Bottom Layer w0.3: DD1.2 70.85,58.35 71.694,58.35 75.694,62.35 80.85,62.35 82.8,64.3 82.9,64.3 85.65,67.05 ; v1(85.4,74.625) 85.4,76.65 82.825,76.65 82.825,74.625 82.8,74.65 82.8,68.7 82.865,68.635 82.865,68.45 84.265,67.05 85.65,67.05 ; XS1.1 85.65,67.05
NetDD1_3: DD1.3 XS1.3 | length 24.2
  Bottom Layer w0.3: DD1.3 70.85,57.55 71.694,57.55 74.944,60.8 81.895,60.8 90.095,69 XS1.3
NetDD1_4: DD1.4 SA1.1 XS1.5 | length 50.7
  Top Layer w0.3: SA1.1@83.5,56.25 91.7,56.25 93.225,56.25 v1(94.325,57.35)
  Bottom Layer w0.3: DD1.4 70.85,56.75 71.694,56.75 74.569,59.625 82.674,59.625 92.049,69 XS1.5 94.325,67.355 v1(94.325,57.35)
NetDD2_1: DD2.1 R40.1 XS2.4 | length 48.8
  Top Layer w0.3: v1(95.15,130.15) 98.9,130.15 99.825,131.075 R40.1
  Bottom Layer w0.3: DD2.1 72.2,128.9 74.475,131.175 76.1,131.175 ; XS2.4 78.84,128.435 76.1,131.175 ; v1(95.15,130.15) 94.125,131.175 76.1,131.175
NetDD2_2: DD2.2 R41.1 XS2.1 | length 37.1
  Top Layer w0.3: v1(76.3,120.2) 88.6,120.2 93.325,124.925 R41.1
  Bottom Layer w0.3: DD2.2@72.25,116.25 DD2.2 73.044,116.2 73.094,116.25 73.236,116.25 76.3,119.314 v1(76.3,120.2) XS2.1
  Bottom Layer w0.5: DD2.2@72.25,116.25 DD2.2@73.094,116.25
NetDD2_3: DD2.3 XS2.3 | length 11.6
  Bottom Layer w0.3: DD2.3 72.35,115.55 73.384,115.55 78.84,121.006 XS2.3
NetDD2_4: DD2.4 SA2.1 XS2.5 | length 26.3
  Top Layer w0.3: v1(75.925,115.275) 77.675,115.275 SA2.1@78.4,114.55
  Top Layer w0.5: SA2.1@78.4,114.55 SA2.1@86.6,114.55
  Bottom Layer w0.3: DD2.4 73.373,114.6 74.048,115.275 ; v1(75.925,115.275) 74.048,115.275 ; XS2.5 81.38,122.607 74.048,115.275
NetHG1_22: HG1.22 VT16.3 | length 3.5
  Bottom Layer w0.3: HG1.22 45.12,147.92 VT16.3
NetHG1_23: HG1.23 VT15.3 | length 4.2
  Bottom Layer w0.3: VT15.3 39.95,150.1 HG1.23
NetHG1_31: HG1.31 VT14.3 | length 4.6
  Bottom Layer w0.3: HG1.31 24.09,150.2 VT14.3
NetHG1_32: HG1.32 VT13.3 | length 3.6
  Bottom Layer w0.3: VT13.3 17.04,150.15 HG1.32
NetHL1_2: HL1.2 R1.2 | length 2.6
  Top Layer w0.3: HL1.2 90.7,83.75 R1.2
NetHL2_K: HL2.K R3.2 | length 4.1
  Bottom Layer w0.3: R3.2 58.5,91.35 HL2.K
NetHL3_K: HL3.K R4.2 | length 4.1
  Bottom Layer w0.3: R4.2 58.5,66.35 HL3.K
NetHL4_K: HL4.K R5.2 | length 4.1
  Bottom Layer w0.3: R5.2 58.5,41.35 HL4.K
NetHL5_K: HL5.K R6.2 | length 4.1
  Bottom Layer w0.3: R6.2 58.5,11.35 HL5.K
NetHL6_2: HL6.2 R2.2 | length 2.7
  Top Layer w0.3: R2.2 83.2,83.75 HL6.2
NetHL7_K: HL7.K R7.2 | length 4.1
  Bottom Layer w0.3: HL7.K 71.5,91.35 R7.2
NetHL8_K: HL8.K R8.2 | length 4.1
  Bottom Layer w0.3: HL8.K 71.5,66.35 R8.2
NetHL9_K: HL9.K R9.2 | length 4.1
  Bottom Layer w0.5: HL9.K 71.85,44.65 R9.2
NetHL10_K: HL10.K R10.2 | length 4.1
  Bottom Layer w0.3: HL10.K 71.85,14.65 R10.2
NetHL11_2: HL11.2 R11.2 | length 2.6
  Top Layer w0.3: HL11.2 99.675,139.6 R11.2
NetHL12_2: HL12.2 R12.2 | length 2.6
  Top Layer w0.3: R12.2 91.175,139.6 HL12.2
NetHL13_1: HL13.1 R33.1 | length 2.9
  Top Layer w0.8: HL13.1 R33.1
NetHL14_2: HL14.2 R36.2 | length 2.6
  Top Layer w0.3: R36.2 44.35,20.65 HL14.2
NetHL15_2: HL15.2 R37.2 | length 2.6
  Top Layer w0.3: HL15.2 49.35,20.5 R37.2
NetR1_1: R1.1 VT1.3 | length 3
  Top Layer w0.3: R1.1 89.7,82.45 VT1.3
NetR2_1: R2.1 VT2.3 | length 3
  Top Layer w0.3: VT2.3 84.2,82.45 R2.1
NetR3_1: R3.1 VT3.3 | length 2.8
  Bottom Layer w0.3: VT3.3 R3.1
NetR4_1: R4.1 VT4.3 | length 2.8
  Bottom Layer w0.3: VT4.3 R4.1
NetR5_1: R5.1 VT5.3 | length 2.8
  Bottom Layer w0.3: VT5.3 R5.1
NetR6_1: R6.1 VT6.3 | length 2.8
  Bottom Layer w0.3: VT6.3 R6.1
NetR7_1: R7.1 VT7.3 | length 2.8
  Bottom Layer w0.3: R7.1 VT7.3
NetR8_1: R8.1 VT8.3 | length 2.8
  Bottom Layer w0.3: R8.1 VT8.3
NetR9_1: R9.1 VT9.3 | length 2.8
  Bottom Layer w0.3: R9.1 VT9.3
NetR10_1: R10.1 VT10.3 | length 2.8
  Bottom Layer w0.3: R10.1 VT10.3
NetR11_1: R11.1 VT11.3 | length 3
  Top Layer w0.3: R11.1 98.675,138.3 VT11.3
NetR12_1: R12.1 VT12.3 | length 3
  Top Layer w0.3: VT12.3 92.175,138.3 R12.1
NetR14_2: R14.2 VT13.1 | length 2.5
  Bottom Layer w0.3: R14.2 13.7,152.15 VT13.1
NetR30_2: R30.2 VT14.1 | length 2.3
  Bottom Layer w0.3: R30.2 22.75,152.2 VT14.1
NetR31_2: R31.2 VT15.1 | length 2.5
  Bottom Layer w0.3: R31.2 35.85,152.1 VT15.1
NetR32_2: R32.2 VT16.1 | length 2.2
  Bottom Layer w0.3: R32.2 46,152.45 VT16.1
NetR34_1: R34.1 VT25.1 | length 2.6
  Top Layer w0.3: R34.1 41.05,11.7 VT25.1
NetR35_1: R35.1 VT26.1 | length 2.6
  Top Layer w0.3: R35.1 48.55,11.7 VT26.1
NetR36_1: R36.1 VT25.3 | length 2.3
  Top Layer w0.3: VT25.3 R36.1
NetR37_1: R37.1 VT26.3 | length 2.3
  Top Layer w0.3: VT26.3 R37.1
NetR38_2: R38.2 VT1.1 | length 2.6
  Top Layer w0.3: R38.2 88.75,76.8 VT1.1
NetR39_2: R39.2 VT2.1 | length 2.6
  Top Layer w0.3: R39.2 83.25,76.8 VT2.1
NetR40_2: R40.2 VT11.1 | length 2.6
  Top Layer w0.3: R40.2 97.725,132.65 VT11.1
NetR41_2: R41.2 VT12.1 | length 2.6
  Top Layer w0.3: R41.2 91.225,132.65 VT12.1
NetR42_2: R42.2 VT3.1 | length 2.6
  Bottom Layer w0.3: R42.2 50.85,89.9 VT3.1
NetR43_2: R43.2 VT4.1 | length 2.6
  Bottom Layer w0.3: R43.2 51,62.65 VT4.1
NetR44_2: R44.2 VT5.1 | length 2.1
  Bottom Layer w0.3: R44.2 50.85,39.9 VT5.1
NetR45_2: R45.2 VT6.1 | length 2.1
  Bottom Layer w0.5: R45.2 50.85,9.9 VT6.1
NetR46_2: R46.2 VT7.1 | length 1.6
  Bottom Layer w0.3: R46.2 79,93.35 VT7.1
NetR47_2: R47.2 VT8.1 | length 1.6
  Bottom Layer w0.3: R47.2 78.85,67.1 VT8.1
NetR48_2: R48.2 VT9.1 | length 1.8
  Bottom Layer w0.3: R48.2 77.95,43 VT9.1
NetR49_2: R49.2 VT10.1 | length 1.6
  Bottom Layer w0.5: VT10.1 79.15,12.1 R49.2
NetXS3_7: XS3.7 XS6.1 | length 234.9
  Bottom Layer w0.3: XS3.7 44.24,5.81 46.175,3.875 124.275,3.875 128.85,8.45 128.85,145.1 125.45,148.5 XS6.1
RX1: DD1.9 XS4.1 | length 8.5
  Bottom Layer w0.3: DD1.9 76.4,52.6 XS4.1
RX2: DD2.9 XS5.1 | length 7.1
  Bottom Layer w0.3: DD2.9 74.4,110.6 XS5.1
SCL: DD1.19 DD2.19 R34.2 XS3.5 | length 137.2
  Top Layer w0.3: v1(44.675,11.6) 44.675,10.925 46.2,9.4 58.575,9.4 64.725,15.55 64.725,37.225 v1(63.95,38) 63.95,88.65 65.775,90.475 65.725,90.475 v1(65.7,90.5)
  Top Layer w0.5: R34.2 43.25,11.6 v1(44.675,11.6)
  Bottom Layer w0.3: DD1.19 63.428,49.272 63.428,40 63.828,39.6 63.828,38.122 v1(63.95,38) ; DD2.19 64.9,91.3 v1(65.7,90.5)
  Bottom Layer w0.5: XS3.5 42.76,11.6 v1(44.675,11.6)
SDA: DD1.20 DD2.20 R35.2 XS3.6 | length 127.8
  Top Layer w0.3: R35.2 57.4,11.5 63.575,17.675 63.575,25.475 63.05,26 63.05,38.373 63.1,38.423 63.1,39.055 v1(62.928,39.227) 62.928,89.453 v1(64.05,90.575)
  Top Layer w0.5: v1(46.875,11.025) 46.989,11.025 47.764,10.25 50.375,10.25 50.65,10.525 R35.2
  Bottom Layer w0.3: DD1.20 62.675,49.225 62.675,43.078 62.928,42.825 v1(62.928,39.227) ; v1(64.05,90.575) 64.1,90.625 DD2.20
  Bottom Layer w0.5: XS3.6 43.9,10.2 46.125,10.2 46.875,10.95 v1(46.875,11.025)
SENS1: DD1.35 SL1.1 | length 72.2
  Bottom Layer w0.3: SL1.1 38.025,95 61.65,71.375 61.65,60.85 DD1.35
SENS2: DD1.34 SL2.1 | length 62.8
  Bottom Layer w0.3: SL2.1 12.825,72.825 58.4,72.825 61,70.225 DD1.34
SENS3: DD1.33 SL3.1 | length 55.1
  Bottom Layer w0.3: SL3.1 24,59 DD1.33
SENS4: DD1.32 SL4.1 | length 75.3
  Bottom Layer w0.3: SL4.1 10,28.9 39.3,58.2 DD1.32
SENS5: DD1.36 SL5.1 | length 77.9
  Bottom Layer w0.3: DD1.36 62.65,60.75 62.65,71.425 86.225,95 SL5.1
SENS6: DD1.37 SL6.1 | length 76.8
  Bottom Layer w0.3: DD1.37 63.4,69.225 77.925,83.75 106.25,83.75 SL6.1
SENS7: DD1.30 SL7.1 | length 125.5
  Bottom Layer w0.3: DD1.30 46,56.6 39.2,49.8 39.2,38.775 46.225,31.75 110.725,31.75 120,41.025 SL7.1
SENS8: DD1.31 SL8.1 | length 129
  Bottom Layer w0.3: DD1.31 45.025,57.4 37.4,49.775 37.4,37.9 47.875,27.425 107.575,27.425 SL8.1
SENS9: DD2.37 SL9.1 | length 25.5
  Bottom Layer w0.3: DD2.37 64.9,124.743 67.225,127.068 67.225,132.225 SL9.1
SOURCE1: HG1.20 HG1.25 HG1.29 HG1.34 VT17.2 | length 57.1
  Top Layer w0.3: v1(14.25,144.75) v1(27,144.75) v1(37,144.75) v1(49.75,144.75)
  Bottom Layer w0.3: HG1.34 14.19,144.81 v1(14.25,144.75) ; HG1.29 27,147.81 v1(27,144.75) ; v1(37,144.75) 37,147.87 HG1.25 ; HG1.20 v1(49.75,144.75) 54.905,144.75 57.455,142.2 VT17.2
SOURCE2: HG1.19 HG1.24 HG1.28 HG1.33 VT18.2 | length 49.5
  Top Layer w0.3: v1(16.75,145.75) v1(29.5,145.75) v1(39.5,145.75) v1(52.25,145.75)
  Bottom Layer w0.3: HG1.33 16.73,145.77 v1(16.75,145.75) ; HG1.28 29.5,147.85 v1(29.5,145.75) ; v1(39.5,145.75) 39.59,145.84 HG1.24 ; v1(52.25,145.75) 52.25,147.88 HG1.19 52.32,147.95 VT18.2
SOURCE3: HG1.3 HG1.8 HG1.12 HG1.17 VT19.2 | length 54.1
  Top Layer w0.3: v1(14.25,136) v1(27,136) v1(37,136) v1(49.75,136)
  Bottom Layer w0.3: HG1.3 14.19,135.94 v1(14.25,136) ; HG1.8 27,132.79 v1(27,136) ; v1(37,136) 37,132.73 HG1.12 ; HG1.17 v1(49.75,136)
  Bottom Layer w0.5: HG1.3 15.2,131.67 15.2,129.7 VT19.2
SOURCE4: HG1.2 HG1.6 HG1.11 HG1.15 VT20.2 | length 54.4
  Top Layer w0.3: v1(11.75,137) v1(22,137) v1(34.5,137) v1(44.5,137)
  Bottom Layer w0.3: HG1.2 11.65,136.9 v1(11.75,137) ; HG1.6 21.81,136.81 v1(22,137) ; v1(34.5,137) 34.5,132.69 HG1.11 ; v1(44.5,137) 44.5,132.85 HG1.15
  Bottom Layer w0.5: HG1.11 34.52,132.68 VT20.2
SOURCE5: HG1.1 HG1.5 HG1.10 HG1.14 VT21.2 | length 58.7
  Top Layer w0.3: v1(9,138.25) v1(19.25,138.25) v1(32,138.25) v1(42,138.25)
  Bottom Layer w0.3: v1(9,138.25) 9.11,138.14 HG1.1 ; v1(19.25,138.25) 19.25,132.7 HG1.5 ; HG1.10 32,132.71 v1(32,138.25) ; v1(42,138.25) 42.13,138.12 HG1.14
  Bottom Layer w0.5: VT21.2 9.11,130.56 HG1.1
SOURCE6: HG1.21 HG1.27 HG1.30 HG1.36 VT22.2 | length 72.8
  Top Layer w0.3: v1(9.25,142.5) v1(24.25,142.5) v1(32,142.5) v1(47.25,142.5)
  Bottom Layer w0.3: HG1.36 9.11,142.64 v1(9.25,142.5) ; v1(24.25,142.5) 24.25,147.82 HG1.30 ; HG1.27 31.97,142.53 v1(32,142.5) ; HG1.21 47.21,142.54 v1(47.25,142.5) 50.95,142.5 VT22.2
SOURCE7: HG1.7 HG1.16 HG1.26 HG1.35 VT23.2 | length 77.9
  Top Layer w0.3: v1(11.75,143.5) 34.25,143.5 v1(34.5,143.75) ; v1(24.5,139.25) v1(34.5,139.25) v1(47,139.25)
  Bottom Layer w0.3: HG1.35 11.65,143.6 v1(11.75,143.5) ; HG1.7 24.35,139.1 v1(24.5,139.25) ; v1(34.5,139.25) v1(34.5,143.75) 34.5,147.91 HG1.26 ; v1(47,139.25) 47,132.89 HG1.16
  Bottom Layer w0.5: HG1.16 47.21,130.39 48.4,129.2 VT23.2
SOURCE8: HG1.4 HG1.9 HG1.13 HG1.18 VT24.2 | length 48.1
  Top Layer w0.3: v1(16.75,135) v1(29.5,135) v1(39.75,135) v1(52.25,135)
  Bottom Layer w0.3: HG1.4 16.73,134.98 v1(16.75,135) ; HG1.9 29.5,132.75 v1(29.5,135) ; HG1.13 39.75,132.84 v1(39.75,135) ; v1(52.25,135) 52.25,132.72 HG1.18
  Bottom Layer w0.5: VT24.2 29,132.25 HG1.9
TX1: DD1.10 XS4.2 | length 5.7
  Bottom Layer w0.3: DD1.10 74.66,51.8 XS4.2
TX2: DD2.10 XS5.2 | length 4.9
  Bottom Layer w0.3: DD2.10 73.775,109.8 75.36,108.215 XS5.2
VCC: R22.2 R23.2 R24.2 R25.2 R26.2 R27.2 R28.2 R29.2 | length 94.6
  Top Layer w0.3: v1(14.7,127.6) v1(35.3,127.6) v1(44.7,127.6) v1(57.5,127.6) 63.9,134 v1(63.9,137.6) v1(63.9,143) v1(63.9,148.7)
  Bottom Layer w0.5: R26.2 14.116,127.6 ; v1(14.7,127.6) 14.116,127.6 ; R24.2 19.625,127.6 17.775,125.75 17.775,123.925 17.516,123.666 15.509,123.666 14.775,124.4 14.775,126.941 14.116,127.6 ; R29.2 v1(35.3,127.6) ; R25.2 44.45,127.35 v1(44.7,127.6) ; R28.2 57,127.1 v1(57.5,127.6) ; v1(63.9,137.6) 64.15,137.35 R27.2 ; v1(63.9,143) 64.4,142.5 R22.2 ; v1(63.9,148.7) 64.4,148.2 R23.2
~15V_PHASE: VD3.A VD5.K XS3.1 | length 11.4
  Bottom Layer w0.7: VD3.A VD5.K 30,9 XS3.1
~15V_ZERO: VD4.A VD6.K XS3.2 | length 12
  Bottom Layer w0.8: XS3.2 31.54,12.54 VD4.A VD6.K
pads on no net: DA1.1 DA1.2 DA1.7 DA1.8 DA1.9 DA1.11 DA1.13 DA1.14 DD1.7 DD1.8 DD1.13 DD1.14 DD1.40 DD1.41 DD1.42 DD1.43 DD1.44 DD2.7 DD2.8 DD2.13 DD2.14 DD2.40 DD2.41 DD2.42 DD2.43 DD2.44

## Polygon pours and split planes (outlines as drawn)
GND on Top Layer "BottomGND" (solid, remove dead copper, pour order 11): -0.025,155 130,155 130,0 -0.025,0
GND on Bottom Layer "BottomGND" (solid, remove dead copper, pour order 13): -0.025,155 130,155 130,0 -0.025,0

## Other copper
Top Layer:
  pour cut-out: 20.325,107.5 -0.025,107.5 -0.025,0 19.92,0
  pour cut-out: 87.55,146 87.55,152.9 116.95,152.9 116.95,146
  pour cut-out: 130.165,107.5 109.816,107.5 109.816,0 129.761,0
  pour cut-out: 8.425,148.725 8.15,148.45 8.15,132.075 53.15,132.075 53.4,132.325 53.4,149
  text "Made in LoTP, RSVPU" at 88.7,150.25 h3
  text "kDick REV.1    2015" at 88.72,147.25 h3
Bottom Layer:
  pour cut-out: 130,112.5 105,112.5 105,0 130,0
  pour cut-out: 25,112.5 -0.025,112.5 -0.025,0 25,0
  pour cut-out: 8.454,149.056 52.953,149.056 53.403,148.606 53.217,148.42 53.217,131.753 8.653,131.753 8.425,131.525

## Silkscreen, mask and mechanical layers (free items; w line width, h text height)
Top Solder:
  rectangle: 87.45,146 116.95,153